# Altium PCB 2016_CARTE_PUISSANCE.PCBDOC
Units mil, origin at the board's own origin, x right, y up, seen from the top; angles counter-clockwise.
Board outline 1909.44 x 1318.88 mil, 4 copper layers (1-TOP, 2-PSSCE, 3-GND, 4-BOTTOM); 38 components, 23 nets, 119 pads, 63 vias.
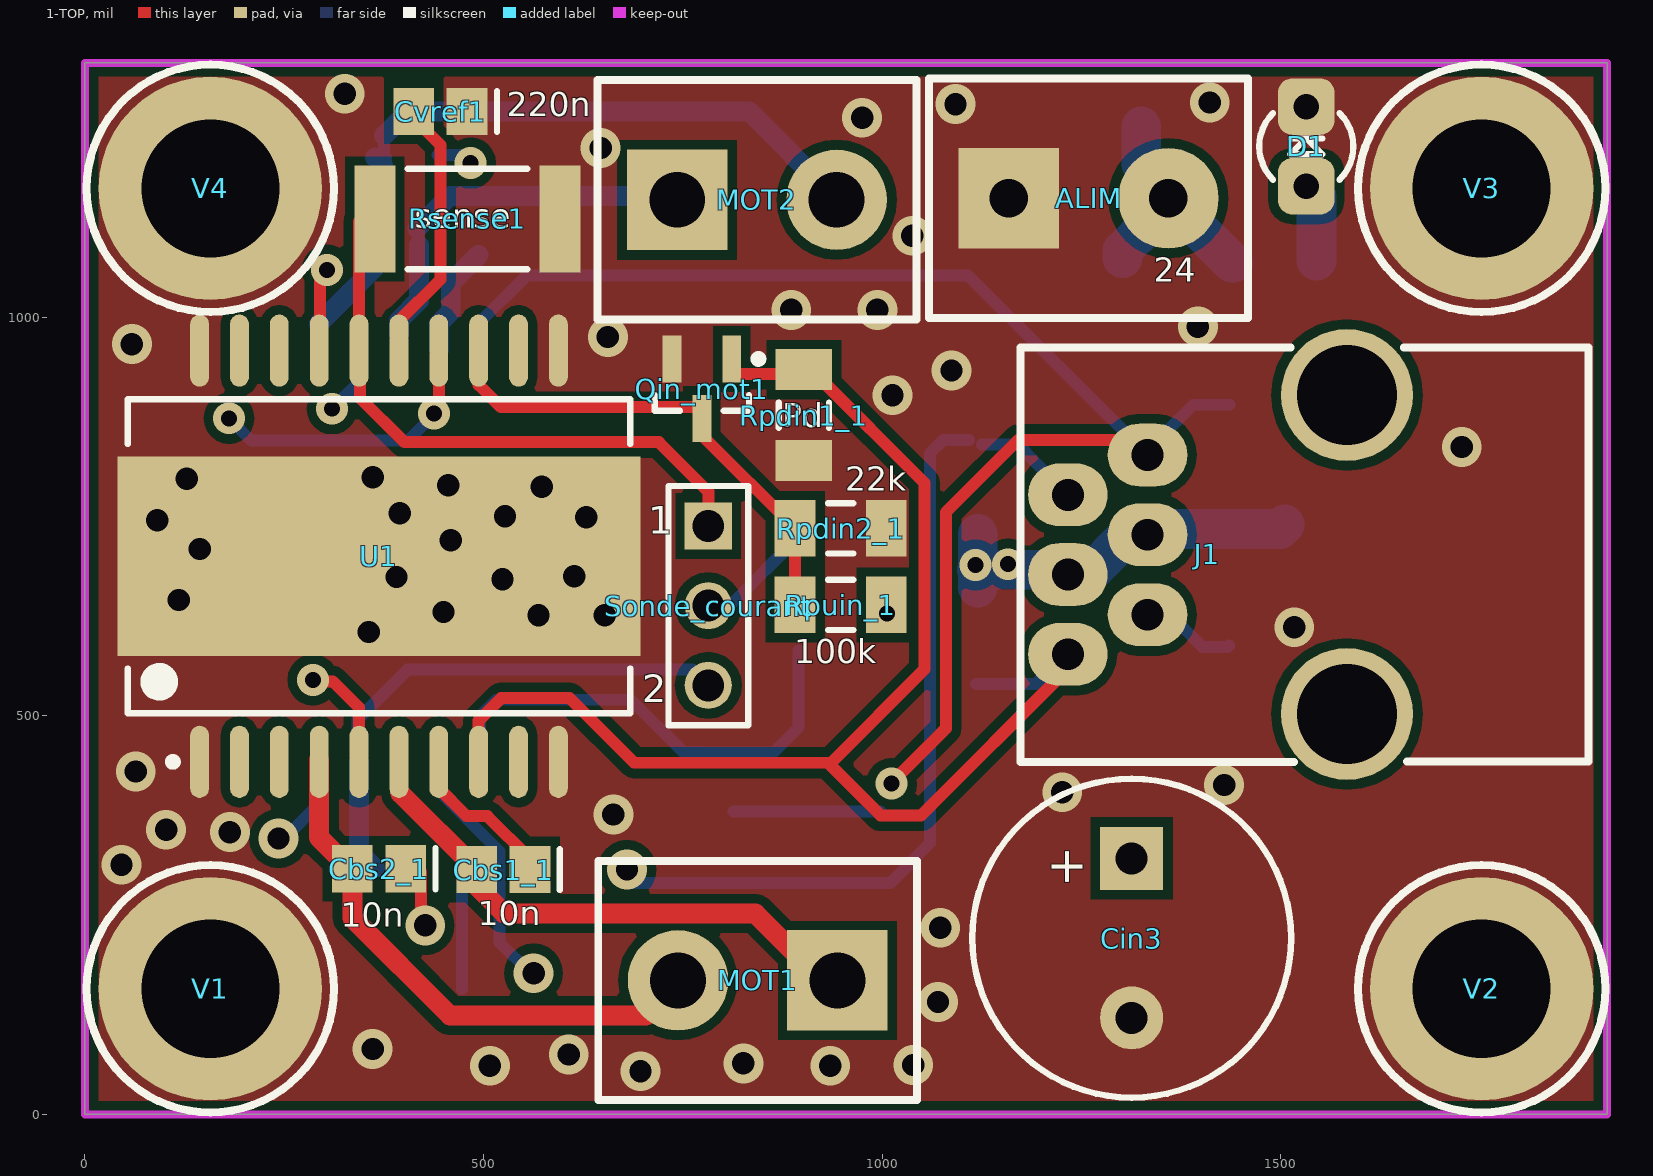
[diagram p0: 1-TOP view]
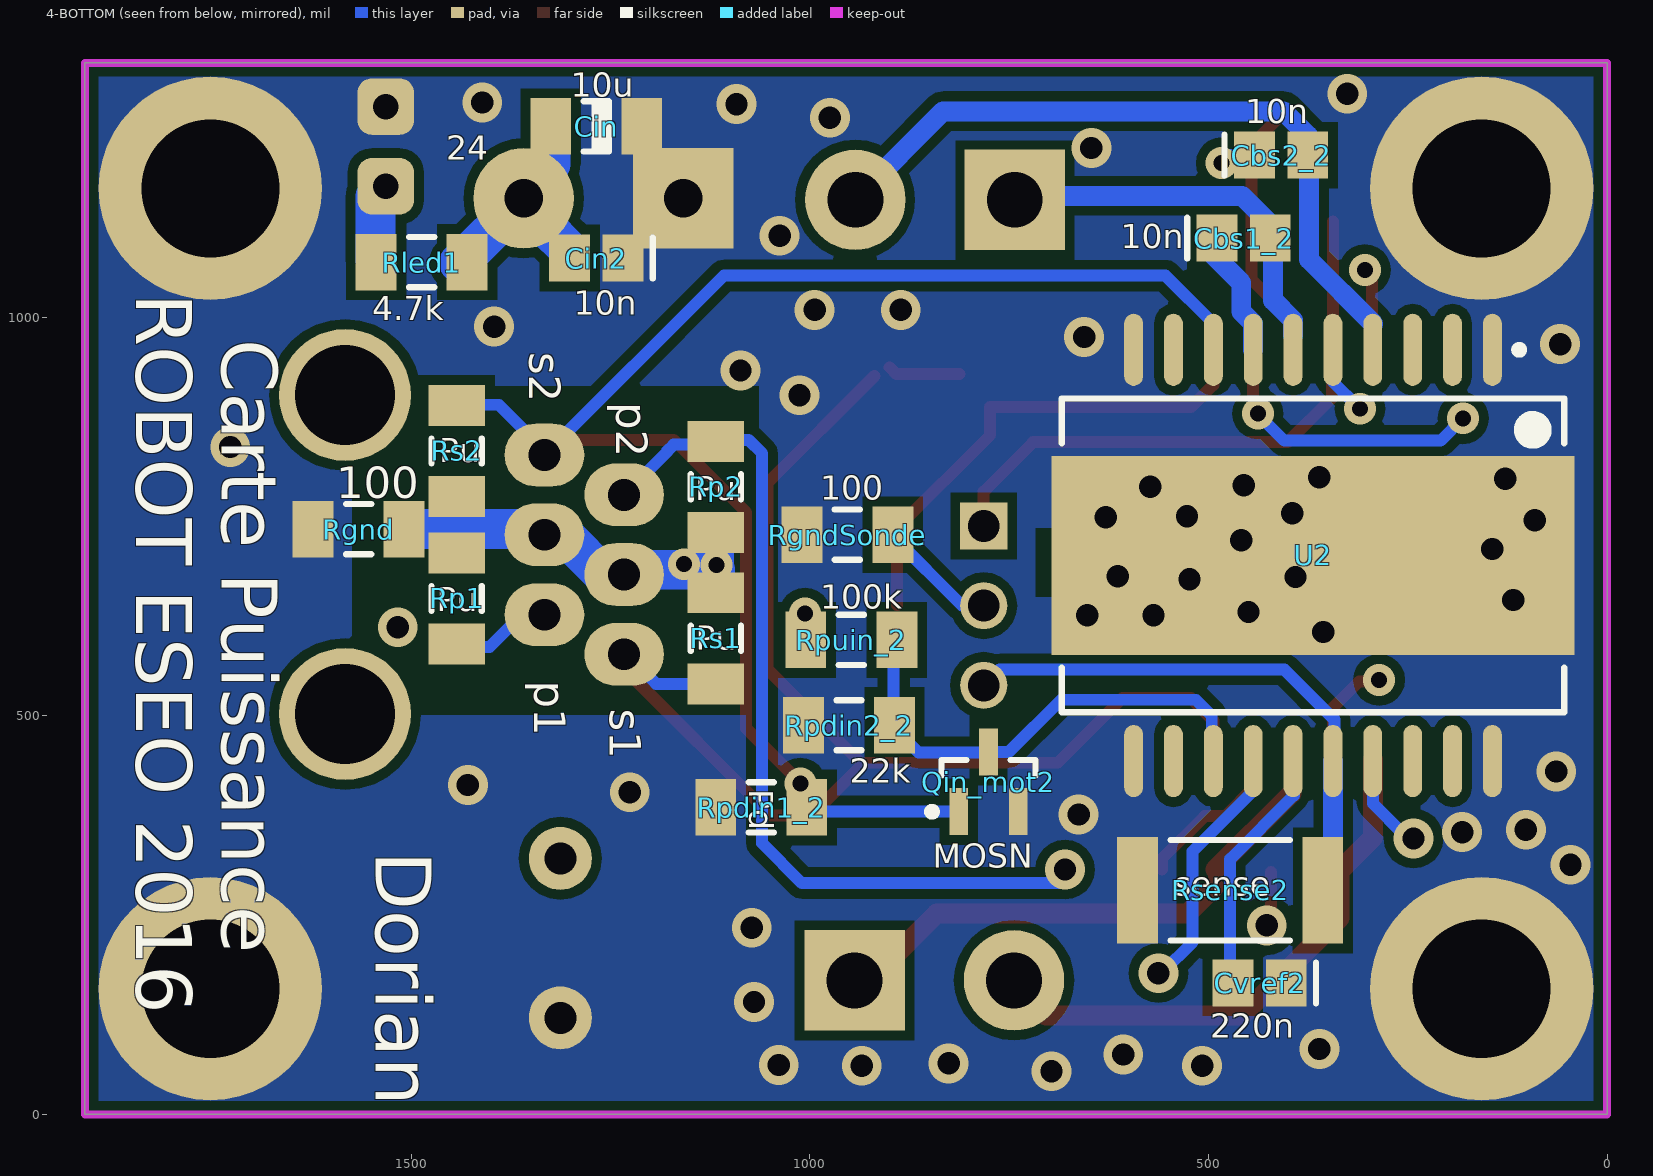
[diagram p1: 4-BOTTOM view, seen from below]
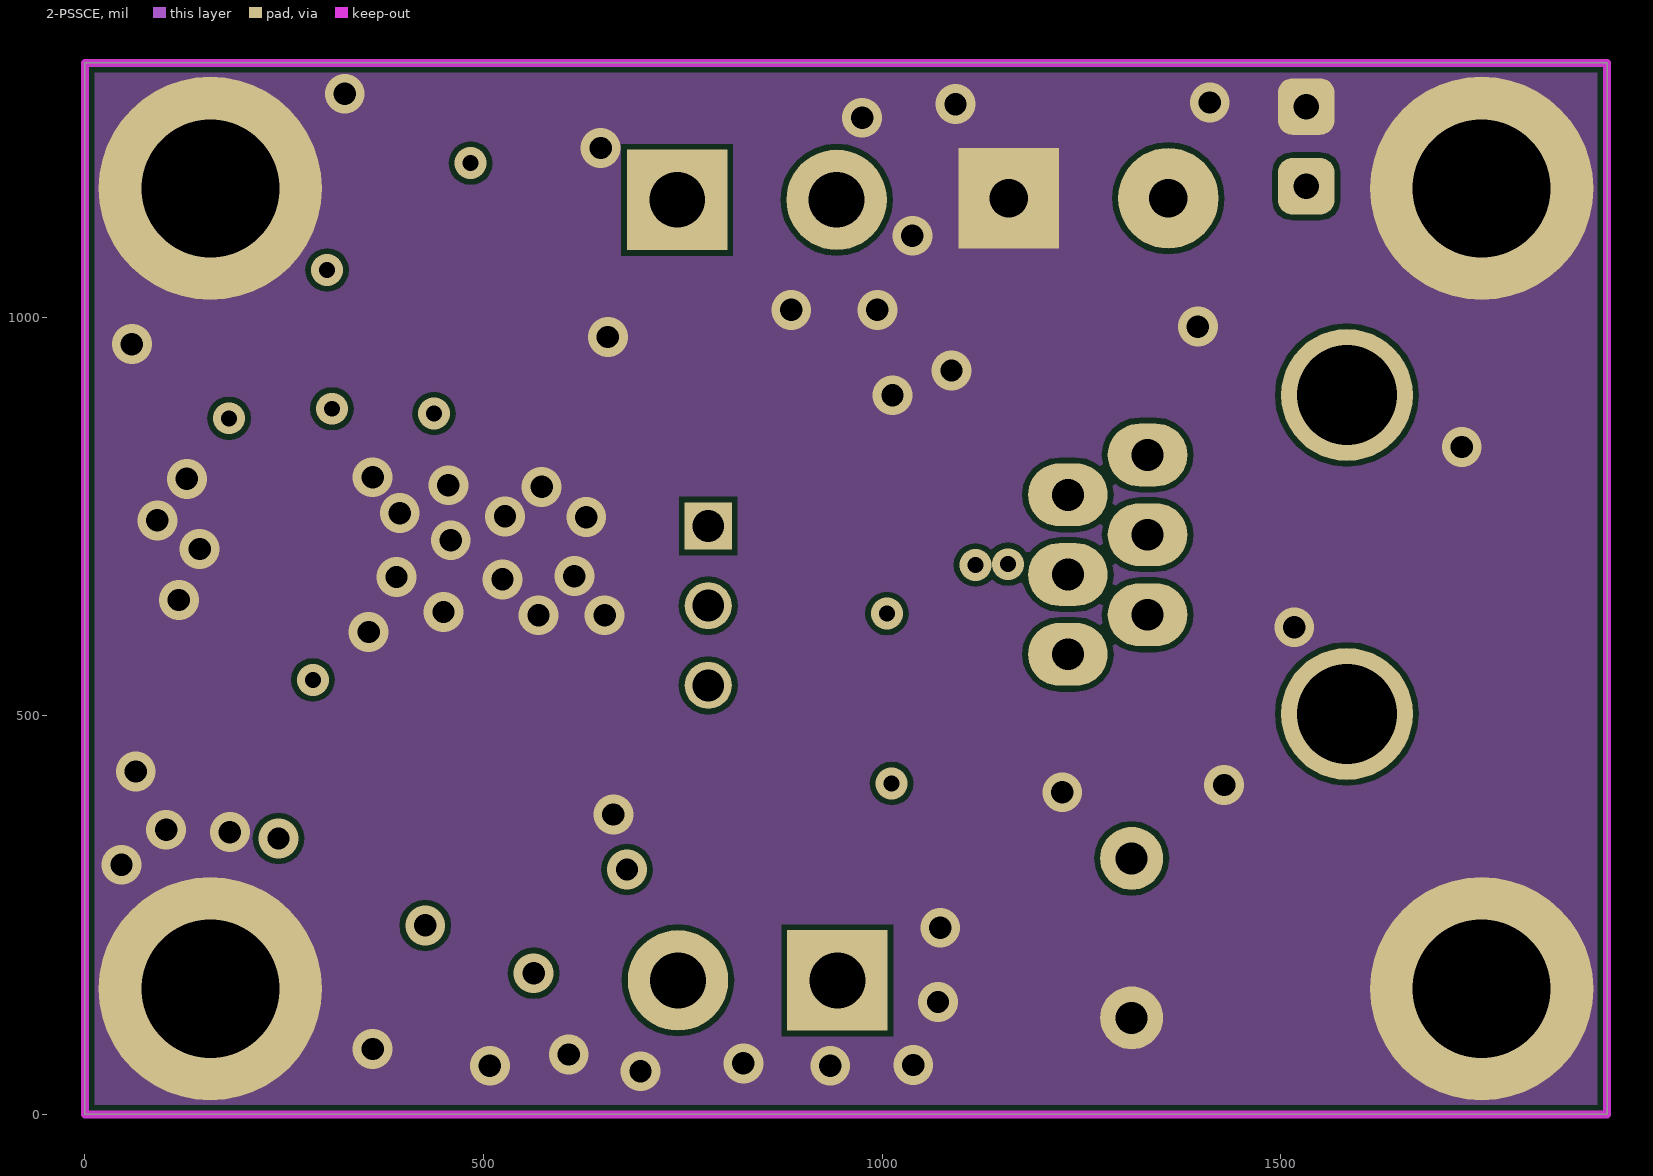
[diagram p2: 2-PSSCE]
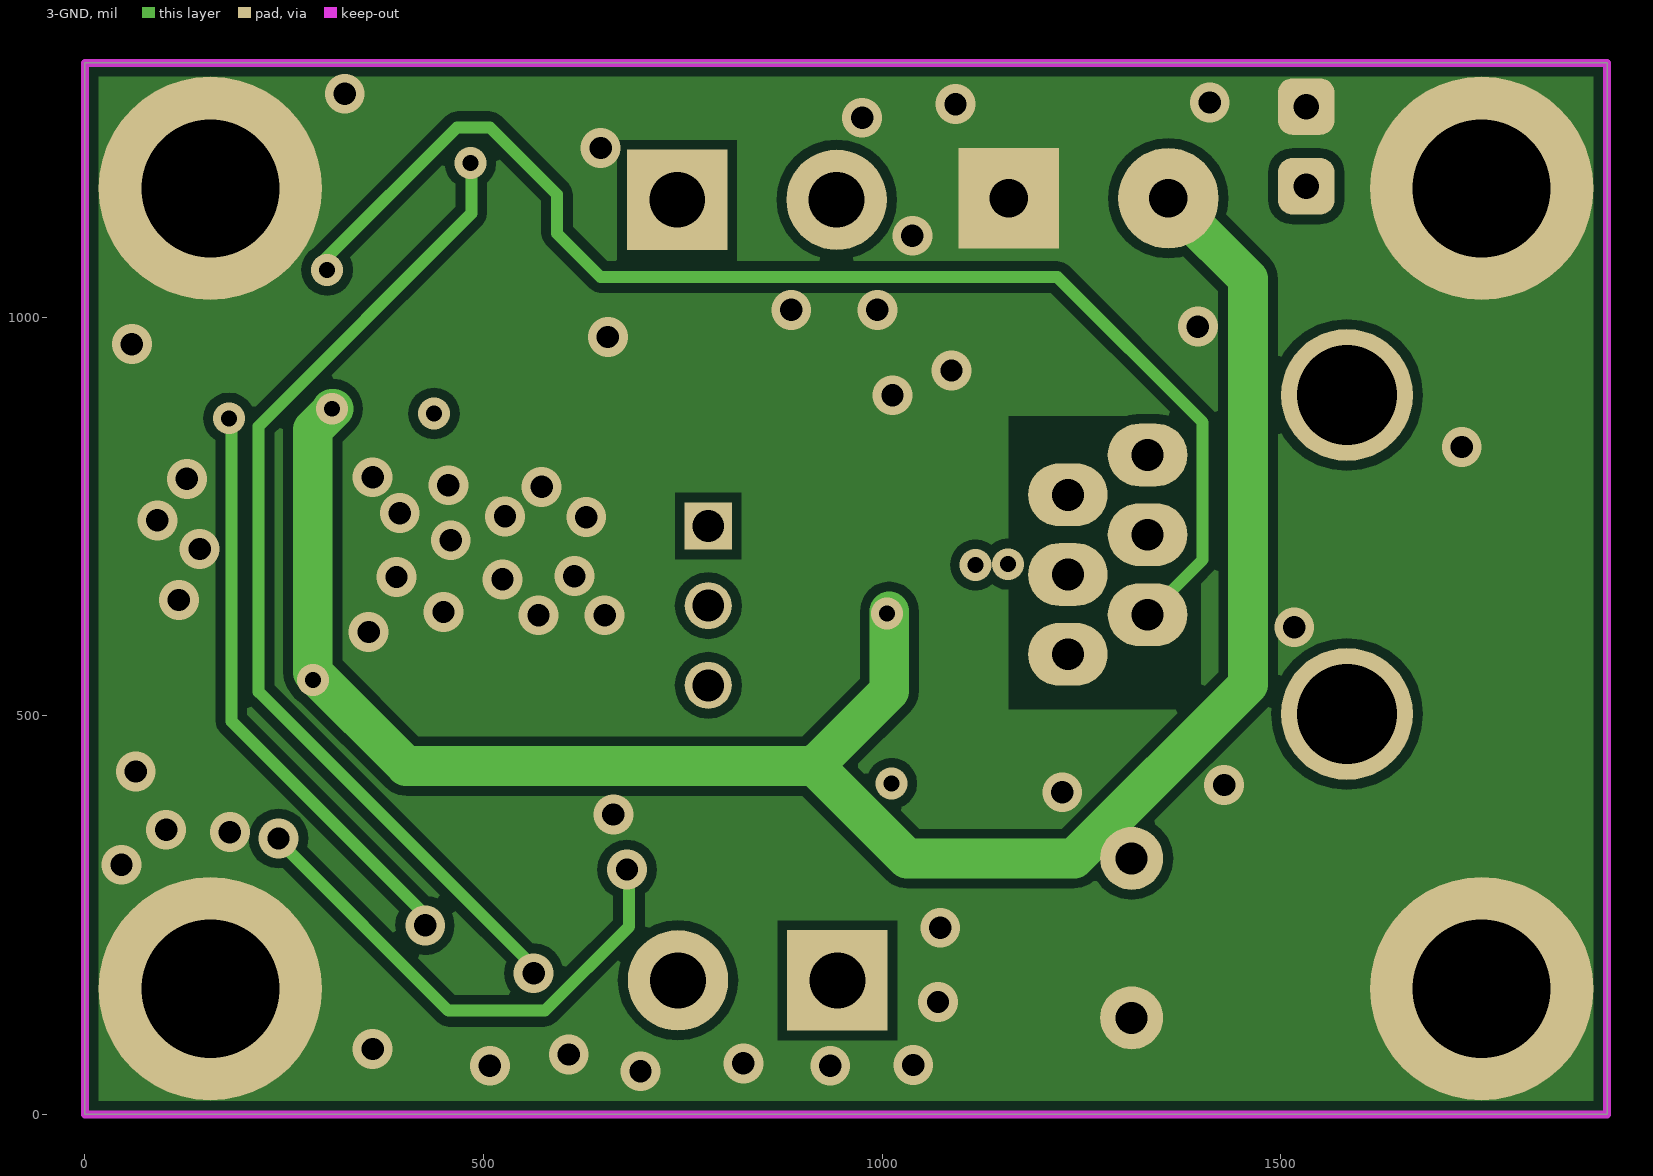
[diagram p3: 3-GND]
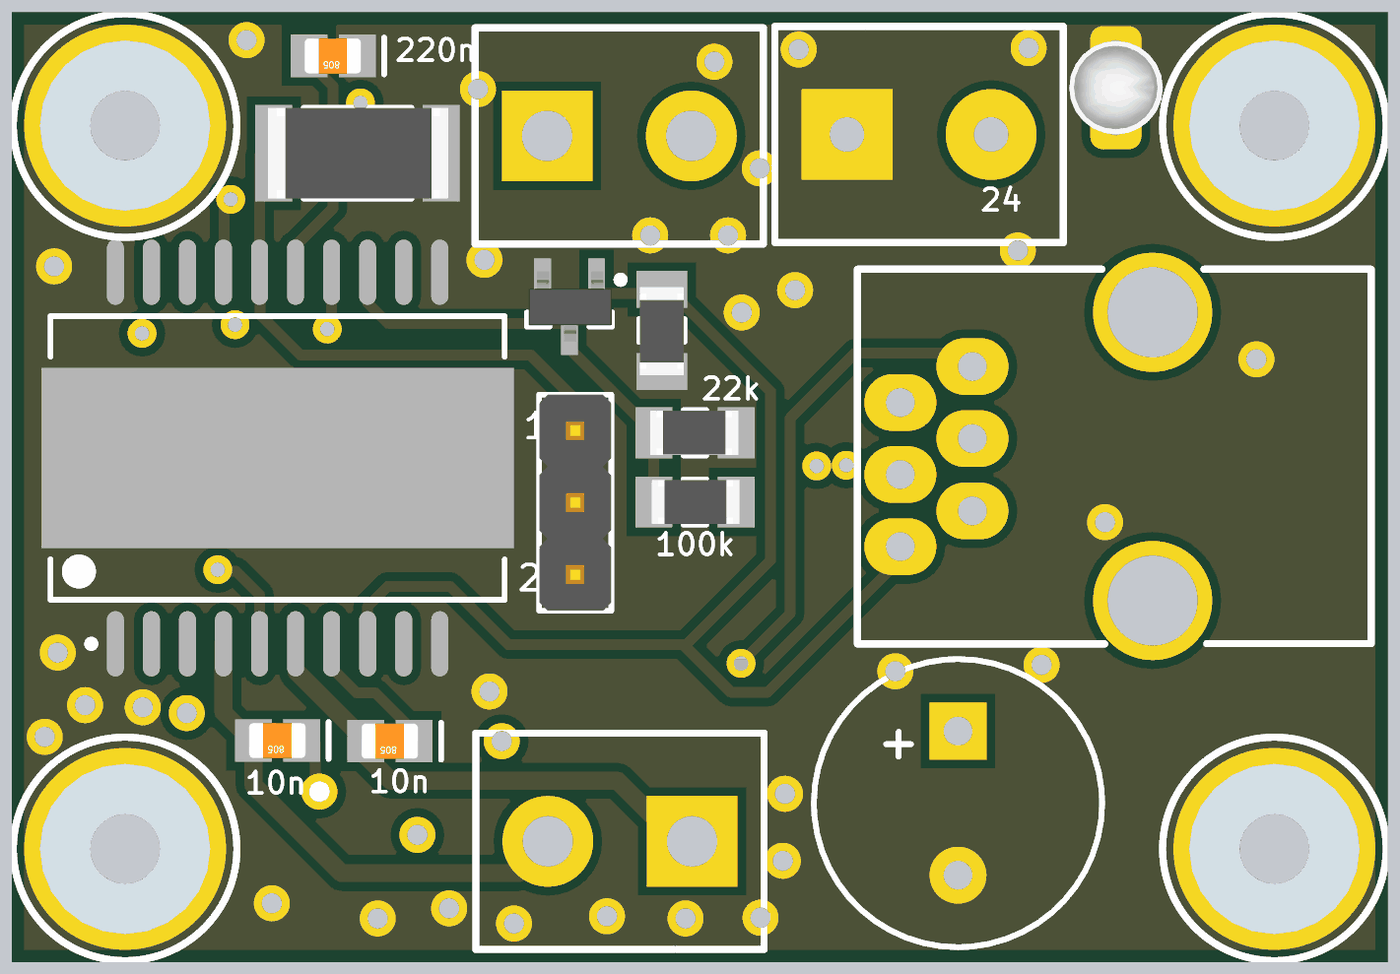
[diagram p4: 3D render of the assembled board from above, using the file's embedded part models]
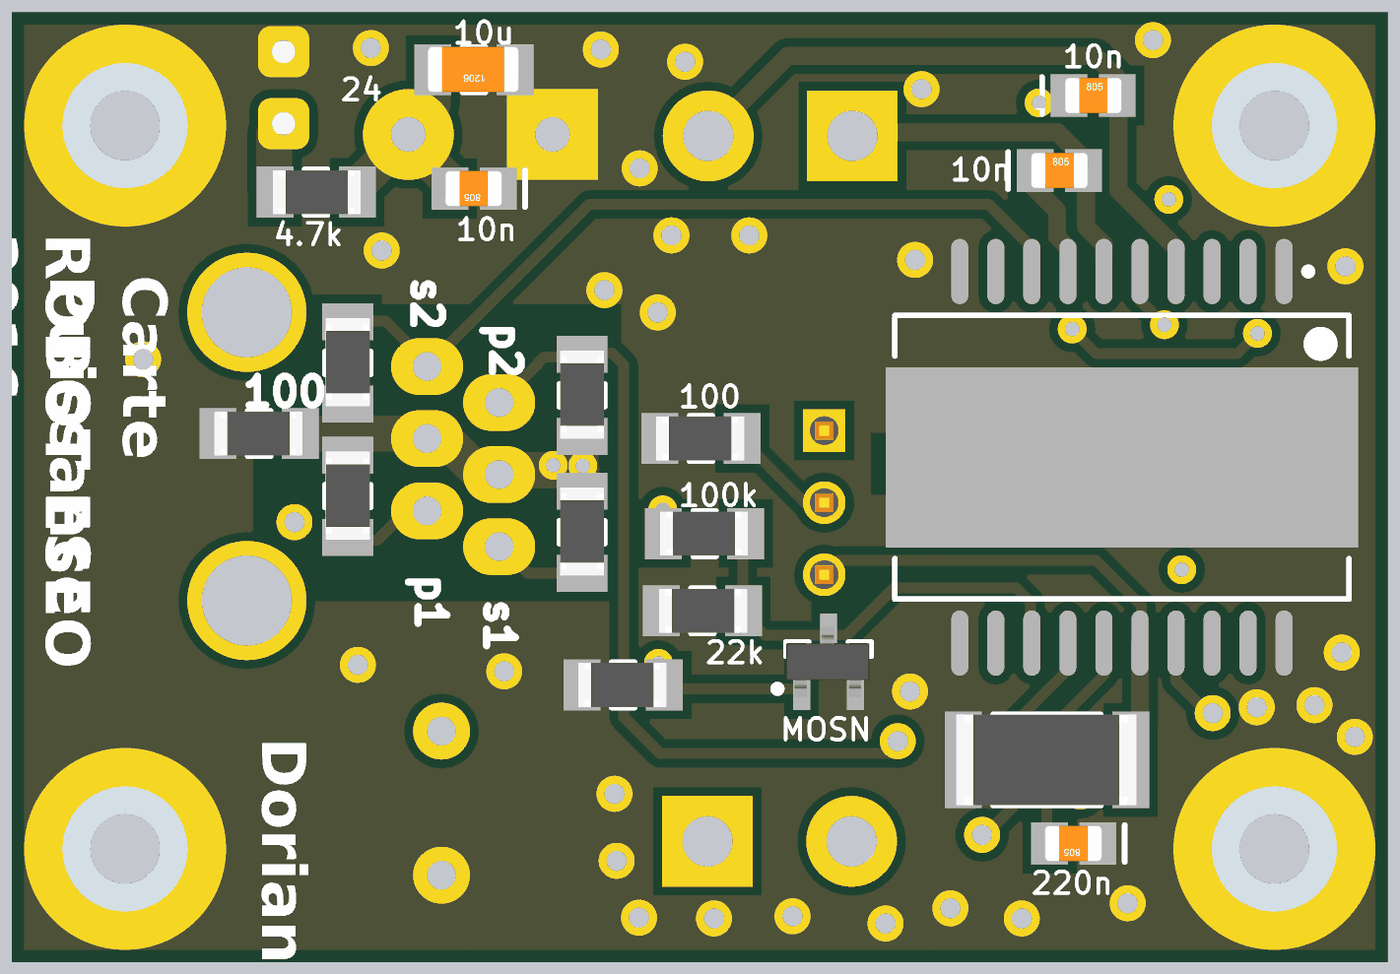
[diagram p5: 3D render of the assembled board from below, using the file's embedded part models]

## Layer stack, top to bottom
Top Solder: solder mask 0.4, Solder Resist, Dk 3.5
1-TOP: signal copper 1.4
Dielectric1: prepreg 12.6, FR-4, Dk 4.8
2-PSSCE: signal copper 1.4
Dielectric2: core 12.6, FR-4, Dk 4.8
3-GND: signal copper 1.4
Dielectric3: prepreg 12.6, FR-4, Dk 4.8
4-BOTTOM: signal copper 1.4
Bottom Solder: solder mask 0.4, Solder Resist, Dk 3.5

## Board outline
0.01,0.02 0.01,1318.9 1909.45,1318.9 1909.45,0.02

## Design rules (kind name [scope] priority, off if disabled: settings)
Clearance Clearance_2 [InNamedPolygon('2-MOT1_1') Or  InNamedPolygon('1-GND') Or  InNamedPolygon('3-GND') Or  InNamedPolygon('2-MOT1_2') Or  InNamedPolygon('2-MOT2_1') Or  InNamedPolygon('2-MOT2_2') Or  InNamedPolygon('4-GND') Or  InNamedPolygon('2-24V')] p1: gap=12
Clearance Clearance_1 [InNamedPolygon('2-MOT1_1') Or  InNamedPolygon('2-24V') Or  InNamedPolygon('2-MOT2_1') Or  InNamedPolygon('2-MOT2_2') Or  InNamedPolygon('2-MOT1_2')] p2: gap=300
Clearance [All] p3: gap=7
FabricationTestPointUsage TestPointUsage [All] p1: valid=0 allowmultiple=FALSE
FabricationTestpoint Testpoint [(IsPad And (OnTopLayer Or OnBottomLayer))] p1: side=3 testpointundercomponent=TRUE minsize=40 maxsize=100 preferedsize=60 minholesize=0 maxholesize=40 preferedholesize=32 testpointgrid=1 allowsidetop=TRUE allowsidebottom=TRUE usegrid=TRUE gridtolerance=0.01
PlaneClearance [All] p1: clearance=10
PlaneConnect [All] p1: planeconnectstyle=Direct reliefexpansion=25 reliefentries=4 reliefconductorwidth=12 reliefairgap=15
PolygonConnect [All] p1: connectstyle=Direct reliefconductorwidth=10 reliefentries=4 polygonreliefangle="90 Angle" airgapwidth=10
RoomDefinition 2016_CARTE_PUISSANCE [InComponentClass('2016_CARTE_PUISSANCE')] p1: confinementstyle=ConfineIn formatcopy=TRUE lockcomponents=FALSE outline 1961.61,50.02 3405.61,50.02 3405.61,482.02 1961.61,482.02
RoutingLayers RoutingLayers_1 [All] p1: top layer_v5=TRUE mid layer 1_v5=FALSE mid layer 2_v5=FALSE bottom layer_v5=TRUE
RoutingLayers [All] p2: top layer_v5=TRUE mid layer 1_v5=FALSE mid layer 2_v5=FALSE bottom layer_v5=TRUE
RoutingVias [All] p1: holewidth=28 width=50 viastyle="Through Hole" minholewidth=28 minwidth=50 maxholewidth=28 maxwidth=50
SolderMaskExpansion [All] p1: expansion=0
Width [All] p1: maxlimit=60 minlimit=10 preferedwidth=15
24 further rules are at their usual default settings.

## Components (designator, comment, footprint, x,y, rotation, side; value= is the part's Value field where it differs from the comment)
ALIM "BORNIER2" BORNIER2#1 1159.01,1149.02 r0 top
Cbs1_1 "10nF" C0805_N 525.01,307.02 r180 top
Cbs1_2 "10nF" C0805_N 456.01,1099.02 r180 bottom
Cbs2_1 "10nF" C0805_N 369.01,308.02 r180 top
Cbs2_2 "10nF" C0805_N 409.01,1203.02 r180 bottom
Cin "10uF" C1206_N 1268.01,1239.02 r0 bottom
Cin2 "10nF" C0805_N 1268.01,1074.02 r0 bottom
Cin3 "Cin3" COND_POL_RAD_5.08B 1313.01,321.02 r270 top
Cvref1 "220nF" C0805_N 446.01,1258.02 r180 top
Cvref2 "220nF" C0805_N 436.01,165.02 r0 bottom
D1 "LED" LED_3mm 1532.01,1214.02 r0 top
J1 "CdeMot" RJ11_6/6 1233.01,777.02 r0 top
MOT1 "BORNIER2" BORNIER2#2 944.01,168.02 r180 top
MOT2 "BORNIER2" BORNIER2#2 743.01,1147.02 r0 top
Qin_mot1 "MOSN" SOT23-3N 774.01,910.02 r270 top
Qin_mot2 "MOSN" SOT23-3N 776.01,417.02 r90 bottom
Rgnd "100" R1206_N 1566.01,734.02 r0 bottom
RgndSonde "100" R1206_N 953.01,727.02 r0 bottom
Rled1 "4,7k" R1206_N 1487.01,1069.02 r180 bottom
Rp1 "10k" R1206_N 1443.01,647.02 r90 bottom
Rp2 "10k" R1206_N 1118.01,787.02 r90 bottom
Rpdin1_1 "10k" R1206_N 902.01,877.02 r270 top
Rpdin1_2 "10k" R1206_N 1061.01,385.02 r0 bottom
Rpdin2_1 "22k" R1206_N 948.01,735.02 r180 top
Rpdin2_2 "22k" R1206_N 951.01,488.02 r180 bottom
Rpuin_1 "100k" R1206_N 948.01,639.02 r0 top
Rpuin_2 "100k" R1206_N 948.01,595.02 r0 bottom
Rs1 "10k" R1206_N 1118.01,597.02 r90 bottom
Rs2 "10k" R1206_N 1443.01,832.02 r90 bottom
Rsense1 "0.05" R2512_N 480.01,1123.02 r180 top
Rsense2 "0.05" R2512_N 473.01,281.02 r180 bottom
Sonde_courant "Header 3" HDR1X3 782.01,738.02 r270 top
U1 "L6201P" PowerSO20_N 369.01,700.02 r90 top
U2 "L6201P" PowerSO20_N 369.01,701.02 r270 bottom
V1 "Entretoise WURTH CMS" ENTRETOISE_CMS 157.48,157.48 r0 top
V2 "Entretoise WURTH CMS" ENTRETOISE_CMS 1751.97,157.48 r0 top
V3 "Entretoise WURTH CMS" ENTRETOISE_CMS 1751.97,1161.42 r0 top
V4 "Entretoise WURTH CMS" ENTRETOISE_CMS 157.48,1161.42 r0 top

## Footprints (in the part's own frame and the unit in brackets; to place one, negate y for a bottom-side part, rotate by r counter-clockwise, add the part's x,y. Pads: shape width x height; smd on the part's side, far side on the other; paste and mask are expansions set on the pad)
BORNIER2#1 [mm] "Connector; Header; 2 Position; screw terminal blocks, Pin Spacing=5.08mm"
  rect 3.2x3.2 hole 1.219: 1(0,0)
  round 3.2 hole 1.219: 2(5.08,0)
  silkscreen extent -2.54,-3.81 7.62,3.81
BORNIER2#2 [mm] "Connector; Header; 2 Position; screw terminal blocks, Pin Spacing=5.08mm"
  rect 3.2x3.2 hole 1.778: 1(0,0)
  round 3.2 hole 1.778: 2(5.08,0)
  silkscreen extent -2.54,-3.81 7.62,3.81
C0805_N [mm] "Chip Capacitor, Body 2.0x1.3mm, IPC Medium Density"
  rect 1.3x1.5 smd: 1(-0.85,0) 2(0.85,0)
  silkscreen extent -1.8,-0.65 -1.8,0.65, body extent -0.99,-0.62 1.01,0.63, height 0.8
C1206_N [mm] "Chip Capacitor, Body 3.2x1.6mm, IPC Medium Density"
  rect 1.3x1.8 smd: 1(-1.45,0) 2(1.45,0)
  silkscreen extent -0.4,-0.8 0.4,0.8, body extent -1.57,-0.81 1.63,0.79, height 1.02
COND_POL_RAD_5.08B [mil] "Capacitor; Polarized; Radial; 10.16mm x 5.08mm"
  rect 79x79 / inner round 79 / far side round 79 hole 40: 1(0,0)
  round 79 hole 40: 2(200,0)
  silkscreen extent -100,-200 300,200
ENTRETOISE_CMS [mil] "Entretoise CMS Wurth trou 4.4mm"
  round 280 hole 173.23: 1(0,0)
  silkscreen extent -155,-155 155,155, body extent -118,-118 118,117, height 118
HDR1X3 [mm]
  rect 1.5x1.5 hole 1.016: 1(0,0)
  round 1.5 hole 1.016: 2(2.54,0) 3(5.08,0)
  silkscreen extent -1.27,-1.27 6.35,1.27, body extent -1.27,-1.27 6.35,1.27, height 10.1
LED_3mm [mm] "LED 3mm; 2 Leads"
  rrect50% 1.8x1.8 hole 0.813: 1(0,-1.27) 2(0,1.27)
  silkscreen extent -1.5,-1.06 1.5,1.06, body extent -1.64,-1.65 1.65,1.65, height 5.51
PowerSO20_N [mm] "SOP, 20-Leads, Body 15.9x11mm, Pitch 1.27mm, IPC Medium Density"
  oval 2.3x0.6 smd: 1(-6.55,5.715) 2(-6.55,4.445) 3(-6.55,3.175) 4(-6.55,1.905) 5(-6.55,0.635) 6(-6.55,-0.635) 7(-6.55,-1.905) 8(-6.55,-3.175) 9(-6.55,-4.445) 10(-6.55,-5.715) 11(6.55,-5.715) 12(6.55,-4.445) 13(6.55,-3.175) 14(6.55,-1.905) 15(6.55,-0.635) 16(6.55,0.635) 17(6.55,1.905) 18(6.55,3.175) 19(6.55,4.445) 20(6.55,5.715)
  rect 6.35x16.65 smd: 20(0,0)
  silkscreen extent -6.67,-8 5,8, body extent -5.55,-8 5.55,8, height 3.6
R1206_N [mm] "Chip Resistor, Body 3.2x1.6mm, IPC Medium Density"
  rect 1.3x1.8 smd: 1(-1.45,0) 2(1.45,0)
  silkscreen extent -0.4,-0.8 0.4,0.8, body extent -1.68,-0.87 1.68,0.87, height 0.71
R2512_N [mm] "Chip Resistor, Body 6.3x3.2mm, IPC Medium Density"
  rect 1.3x3.4 smd: 1(-2.95,0) 2(2.95,0)
  silkscreen extent -1.9,-1.6 1.9,1.6, body extent -3.22,-1.68 3.22,1.68, height 0.71
RJ11_6/6 [mm] "Connector; RJ11; 6P/6C; Low Profil; Right Angle; Pin Spacing=2.54mm"
  oval 2.54x2 hole 1.016: 1(0,-5.08) 2(2.54,-3.82) 3(0,-2.54) 4(2.54,-1.27) 5(0,0) 6(2.54,1.27)
  round 4.2 hole 3.175: FIX1(8.89,3.18) FIX2(8.89,-6.98)
  silkscreen extent -1.51,-8.51 16.59,4.7
SOT23-3N [mm] "SOT23, 3-Leads, Body 2.9x1.3mm, Pitch 0.95mm, Lead Span 2.5mm, IPC Medium Density"
  rect 1.5x0.6 smd: 1(-0.95,0.95) 2(-0.95,-0.95) 3(0.95,0)
  silkscreen extent -1.07,-1.5 0.7,1.93, body extent -1.24,-1.5 1.23,1.5, height 1.1

## Part data
ALIM MOT1 MOT2: "Terminal blocks, 2 pins, pitch=5mm"
Cbs1_1 Cbs1_2 Cbs2_1 Cbs2_2 Cin Cin2 Cvref1 Cvref2: library part Capacitor, "Capacitor"
Cin3: library part CONDENSATEUR_POLARISE, "Polarized Capacitor"
D1: "Typical LED"
J1: library part CONNECTEUR_RJ12
Qin_mot1 Qin_mot2: library part "Transistor MOSFET-N", "N-Channel MOSFET"
Rgnd RgndSonde Rled1 Rp1 Rp2 Rpdin1_1 Rpdin1_2 Rpdin2_1 Rpdin2_2 Rpuin_1 Rpuin_2 Rs1 Rs2 Rsense1 Rsense2: library part Resistor, "Resistor"
Sonde_courant: "Header, 3-Pin"
U1 U2: "DMOS Full Bridge Driver"
V1 V2 V3 V4: "Entretoise Wurth"

## Via types
v1: diameter 50, hole 28, 1-TOP to 4-BOTTOM, 53 vias
v2: diameter 40, hole 20, 1-TOP to 4-BOTTOM, 10 vias

## Nets (pads, with @x,y where several pads share a name; then routed paths per layer and width w, separated by ;. In a path a pad name is that pad's centre, name@x,y a point inside that pad or via, vN(x,y) a via of type N, cw(c..) or ccw(c..) an arc to the next point about the centre after c; other vN are vias at no path point)
24V: ALIM.2 Cin2.2 Cin3.1 Cin.2 Rled1.2 Rpuin_1.2 Rpuin_2.2 U1.5 U2.5 | length 3025.3
  1-TOP w15: v2@290.01,543.02 311.01,543.02 344.01,510.02 U1.5@344.01,445.14
  3-GND w50: v2(310.01,885.02) 312.01,885.02 286.01,859.02 286.01,554.02 403.01,437.02 915.01,437.02 1009.01,531.02 v2@1009.01,631.02 ; 913.01,439.02 1031.01,321.02 1241.01,321.02 1459.01,539.02 1459.01,1048.02 ALIM.2@1376.01,1131.02
  4-BOTTOM w15: v2@312.01,887.02 344.01,919.02 U2.5
  4-BOTTOM w50: Cin2.2 1301.47,1083.48 ALIM.2@1333.01,1115.02 ; Cin.2 1325.09,1191.93 ALIM.2@1349.01,1168.02 ; ALIM.2@1364.01,1143.02 1439.01,1068.02 Rled1.2@1439.92,1068.02
  other v2: 286.01,545.02 1006.01,628.02
GND: ALIM.1 Cin2.1 Cin3.2 Cin.1 Cvref1.1 Cvref2.1 D1.2 Qin_mot1.2 Qin_mot2.2 Rgnd.2 RgndSonde.2 Rpdin1_1.2 Rpdin1_2.2 Rpdin2_1.1 Rpdin2_2.1 Rsense1.1 Rsense2.1 U1.1 U1.10 U1.11 U1.20 U2.1 U2.10 U2.11 U2.20 V1.1 V2.1 V3.1 V4.1
  other v1: 697.01,54.02 508.01,61.02 935.01,61.02 1039.01,62.02 826.01,64.02 607.01,75.02 361.01,82.02 1070.01,141.02 1073.01,234.02 46,313 182.01,354.02 102.01,357.02 663.01,376.02 1226.01,404.02 1429.01,413.02 64.01,430.02 356.01,605.02 1517.01,611.02 569.01,626.02 652.01,626.02 450.01,630.02 118.01,645.02 524.01,671.02 391.01,674.02 614.01,675.02 144.01,709.02 459.01,720.02 91.01,745.02 629.01,749.02 527.01,750.02 395.01,754.02 573.01,787.02 456.01,789.02 128.01,797.02 361.01,799.02 1727.01,837.02 1013,902 1087.01,933.02 59.01,966.02 656.01,975.02 1396.01,988.02 886.01,1009.02 994.01,1009.02 1038.01,1102.02 647.01,1212.02 975.01,1250.02 1092.01,1267.02 1411.01,1269.02 326.01,1280.02
GND_CDE: J1.3 J1.4 Rgnd.1 Rp1.2 Rp2.1 Rs1.2 Rs2.1 | length 557.5
  4-BOTTOM w15: Rp2.1 1118.01,661.02 1121.01,658.02 1121.01,681.02 v2@1119.01,683.02 ; J1.3@1217.01,683.02 J1.3@1220.01,680.02 ; J1.3 J1.3@1259.01,677.02
  4-BOTTOM w50: v2@1119.01,683.02 J1.3@1217.01,683.02 ; Rs1.2@1120.01,661.02 Rp2.1@1120.01,728.02 ; J1.3@1259.01,677.02 1307.01,725.02 J1.4@1325.01,725.02 ; J1.4 1340.01,734.02 1499.01,734.02 Rgnd.1@1505.01,740.02
  other v2: 1117.01,689.02 1158.01,690.02
I_SONDE_1: Rsense1.2 Sonde_courant.1 U1.16 | length 726
  1-TOP w15: U1.16@341.01,983.02 344.01,986.02 Rsense1.2@344.01,1119.87 ; U1.16@345.01,958.02 345.01,899.02 401.01,843.02 720.01,843.02 782.01,781.02 Sonde_courant.1
I_SONDE_2: Rsense2.2 Sonde_courant.3 U2.16 | length 663.8
  4-BOTTOM w15: U2.16@342.01,448.02 342.01,495.02 405.01,558.02 762.01,558.02 Sonde_courant.3
  4-BOTTOM w25: U2.16 344.01,329.02 Rsense2.2@364.01,309.02
IN2_1: Qin_mot1.3 Rpdin2_1.2 Rpuin_1.1 U1.13 | length 644.2
  1-TOP w15: U1.13@494.01,960.89 494.01,915.02 522.01,887.02 774.01,887.02 774.01,851.93 Rpdin2_1.2 ; Rpdin2_1.2@883.01,742.02 890.92,734.1 Rpuin_1.1
IN2_2: Qin_mot2.3 Rpdin2_2.2 Rpuin_2.1 U2.13 | length 570.7
  4-BOTTOM w15: U2.13@496.01,472.02 496.01,500.02 516.01,520.02 685.01,520.02 750.61,454.42 Qin_mot2.3 ; Qin_mot2.3@778.01,453.02 779.01,454.02 864.01,454.02 894.92,484.93 Rpuin_2.1@894.92,582.02
MOT1_1: Cbs1_1.2 MOT1.1 U1.6 | length 706
  1-TOP w15: U1.6@396.01,402.55 U1.6@396.01,456.02 ; Cbs1_1.2@493.01,285.02 Cbs1_1.2@493.01,303.02 ; MOT1.1@925.01,168.02 MOT1.1
  1-TOP w25: U1.6@396.01,402.55 Cbs1_1.2 ; Cbs1_1.2@493.01,285.02 526.01,252.02 841.01,252.02 MOT1.1@925.01,168.02
MOT1_2: Cbs2_1.2 MOT1.2 U1.4 | length 692.7
  1-TOP w15: Cbs2_1.2@335.54,305.48 Cbs2_1.2 ; MOT1.2@704.01,124.02 MOT1.2@743.01,163.02
  1-TOP w25: U1.4@294.01,445.14 294.01,347.02 335.54,305.48 335.54,246.48 458.01,124.02 MOT1.2@704.01,124.02
MOT2_1: Cbs1_2.2 MOT2.1 U2.6 | length 462.2
  4-BOTTOM w15: MOT2.1@735.01,1150.02 MOT2.1@737.01,1148.02
  4-BOTTOM w25: U2.6@394.01,977.02 394.01,996.02 419.01,1021.02 Cbs1_2.2@419.01,1090.02 ; Cbs1_2.2@417.01,1111.02 458.01,1152.02 MOT2.1@736.01,1152.02
MOT2_2: Cbs2_2.2 MOT2.2 U2.4 | length 933.7
  4-BOTTOM w15: U2.4@293.47,991.48 293.47,969.55 U2.4@294.01,969.02 ; Cbs2_2.2@364.01,1200.02 Cbs2_2.2@378.01,1200.02 ; Cbs2_2.2 Cbs2_2.2@375.54,1227.55 ; MOT2.2@940.01,1151.02 MOT2.2@945.01,1151.02
  4-BOTTOM w25: U2.4@293.47,991.48 374.01,1072.02 374.01,1190.02 Cbs2_2.2@364.01,1200.02 ; Cbs2_2.2@375.54,1227.55 406.01,1258.02 833.01,1258.02 MOT2.2@940.01,1151.02
NetCbs1_1_1: Cbs1_1.1 U1.7 | length 189.1
  1-TOP w15: U1.7@443.01,433.02 443.01,410.02 479.01,374.02 505.01,374.02 558.47,320.55 Cbs1_1.1
NetCbs1_2_1: Cbs1_2.1 U2.7 | length 139.8
  4-BOTTOM w25: U2.7 444.01,992.01 459,1007 459,1043 Cbs1_2.1@494,1078
NetCbs2_1_1: Cbs2_1.1 U1.14 | length 1151.7
  1-TOP w15: Cbs2_1.1@421.47,304.02 421.47,258.55 v1@440.01,240.02 ; v2@440.01,892.02 444.01,896.02 U1.14@444.01,960.89
  3-GND w15: v2@184.01,873.02 184.01,493.02 v1@425.51,251.52
  4-BOTTOM w15: v2(181.01,873.02) 209.01,845.02 405.01,845.02 v2@442.01,882.02
  other v1: 427.01,237.02
  other v2: 438.01,879.02
NetCbs2_2_1: Cbs2_2.1 U2.14 | length 1623.6
  3-GND w15: v2@485.01,1196.02 485.01,1130.02 218.01,863.02 218.01,530.02 561.01,187.02 v1@561.01,176.02
  4-BOTTOM w15: Cbs2_2.1 v2@482.01,1203.02 ; U2.14@444.01,442.14 444.01,406.02 520.01,330.02 520.01,216.02 v1@558.01,178.02
  other v1: 563.01,177.02
  other v2: 484,1193
NetCvref1_2: Cvref1.2 U1.15 | length 328.4
  1-TOP w15: U1.15@394.01,965.02 394.01,995.02 446.01,1047.02 446.01,1215.86 412.54,1249.32 Cvref1.2
NetCvref2_2: Cvref2.2 U2.15 | length 330.4
  4-BOTTOM w15: U2.15@396.01,453.02 393.01,450.02 393.01,400.02 473.01,320.02 Cvref2.2@473.01,157.02
NetD1_1: D1.1 Rled1.1 | length 98.4
  4-BOTTOM w50: D1.1 1545.01,1151.02 Rled1.1@1545.01,1071.02
NetRgndSonde_1: RgndSonde.1 Sonde_courant.2 | length 151.5
  4-BOTTOM w15: Sonde_courant.2 809.01,638.02 RgndSonde.1@897.01,726.02
PWM1: J1.2 Rp1.1 U1.17 | length 1862.3
  1-TOP w15: U1.17@294.01,960.89 295.01,961.89 v2@295.01,1061.02
  3-GND w15: v2@300.01,1052.02 300.01,1071.02 467.01,1238.02 508.01,1238.02 592.01,1154.02 592.01,1105.02 647.02,1050 1220.02,1050 1402.01,868.02 1402.01,695.62 J1.2
  4-BOTTOM w15: J1.2 1361.4,626.62 1402.01,586.02 1433.01,586.02 Rp1.1@1435.01,588.02
  other v2: 304.01,1059.02
PWM2: J1.5 Rp2.2 U2.17 | length 1823.3
  3-GND w15: v1@245.01,341.02 456.01,130.02 577.01,130.02 682.51,235.52 v1@682.51,306.52
  4-BOTTOM w15: v1@255.01,351.02 294.01,390.02 U2.17@294.01,442.14 ; v1@684.01,290.02 1010.01,290.02 1060.01,340.02 1060.01,829.02 1077.01,846.02 Rp2.2@1109.01,846.02 ; Rp2.2@1125.01,840.02 1171.01,840.02 1179.01,832.02 1179.01,831.02 J1.5
  other v1: 680.01,307.02 243.01,346.02
SENS1: J1.1 Qin_mot1.1 Rpdin1_1.1 Rs1.1 U1.8 | length 1761
  1-TOP w15: U1.8@494.01,445.14 494.01,494.02 522.01,522.02 608.01,522.02 689.01,441.02 936.01,441.02 1053.01,558.02 1053.01,792.02 Rpdin1_1.1@919.01,926.02 ; Qin_mot1.1@812.41,928.42 891.41,928.42 Rpdin1_1.1@900.01,937.02 ; 934.01,439.02 998.01,375.02 1049.01,375.02 1230.01,556.02 J1.1@1230.01,576.02
  4-BOTTOM w15: Rs1.1 1192.92,539.93 J1.1@1230.01,577.02
SENS2: J1.6 Qin_mot2.1 Rpdin1_2.1 Rs2.2 U2.8 | length 1959.3
  1-TOP w15: v2@1016.01,420.02 1080.01,484.02 1080.01,755.02 1171.01,846.02 1314.01,846.02 J1.6
  4-BOTTOM w15: U2.8@494.01,967.02 494.01,992.01 554.02,1052.02 1108.01,1052.02 J1.6 1333.01,833.02 1390.01,890.02 Rs2.2@1436.01,890.02 ; Qin_mot2.1 Rpdin1_2.1@998.01,379.61
  other v2: 1012.01,415.02
pads on no net: J1.FIX1 J1.FIX2 U1.2 U1.3 U1.9 U1.12 U1.18 U1.19 U2.2 U2.3 U2.9 U2.12 U2.18 U2.19

## Polygon pours and split planes (outlines as drawn)
GND on 2-PSSCE "2-GND" (solid, pour order 8): 2,1317 1907,1317 1907,4 2,4
GND on 1-TOP "1-GND" (solid, pour order 7): 2,1317 1907,1317 1907,4 2,4
GND on 3-GND "3-GND" (solid, pour order 6): 2,1317 1907,1317 1907,4 2,4
GND on 4-BOTTOM "4-GND" (solid, pour order 5): 2,1317 1907,1317 1907,4 2,4

## Keep-outs
Keep-Out Layer:
  the board outline again, w10

## Other copper
3-GND:
  pour cut-out: 1400.01,876.52 1400.01,507.52 1158.01,507.52 1158.01,876.52
4-BOTTOM:
  pour cut-out: 683.01,735.02 717.01,735.02 717.01,649.02 683.01,649.02
  pour cut-out: 1064.01,501.02 1064.01,913.02 1574.01,913.02 1574.01,501.02

## Silkscreen, mask and mechanical layers (free items; w line width, h text height)
Top Overlay:
  text "220n" at 529,1252 h30
  text "sense" at 414,1112 h30
  text "24" at 1341,1044 h30
  text "Pd" at 875,862 h30
  text "22k" at 954,782 h30
  text "1" at 707,728 h35
  text "100k" at 890,566 h30
  text "2" at 699,517 h35
  text "10n" at 493,237 h30
  text "10n" at 321,235 h30
Bottom Overlay:
  text "10u" at 1300,1276 h30
  text "10n" at 454,1243 h30
  text "24" at 1456,1197 h30
  text "10n" at 610,1086 h30
  text "ROBOT ESEO 2016" at 1868,1030 h120 r90
  text "10n" at 1296,1003 h30
  text "4.7k" at 1549,996 h30
  text "Carte Puissance" at 1761,972 h120 r90
  text "s2" at 1352.01,956.02 h40 r90
  text "p2" at 1243.01,893.02 h40 r90
  text "Pu" at 1465,818 h30
  text "100" at 1594,773 h40
  text "100" at 987,771 h30
  text "Pu" at 1144,770 h30
  text "100k" at 987,634 h30
  text "Pu" at 1468,631 h30
  text "Pu" at 1143,583 h30
  text "p1" at 1346.01,544.02 h40 r90
  text "s1" at 1251.01,509.02 h40 r90
  text "22k" at 950,416 h30
  text "Pd" at 1076,408 h30 r90
  text "Dorian" at 1568,330 h120 r90
  text "MOSN" at 846,309 h30
  text "sense" at 543,274 h30
  text "220n" at 498,96 h30

## Dimensions
0.01,1318.9 to 1909.45,1318.9 on Mechanical 15
0.01,0.02 to 0.01,1318.9 on Mechanical 15
0.01,0.02 to 157.48,157.48 on Mechanical 15
157.48,1161.42 to 0.01,1318.9 on Mechanical 15
0.01,1318.9 to 157.48,1161.42 on Mechanical 15
1751.97,1161.42 to 1909.45,1318.9 on Mechanical 15

## Text inside footprints (layer, text, board x,y; h text height)
Cin3: Top Overlay "+" at 1213.01,336.02 h45 r270